# Altium PCB PCB_cut_wire.PcbDoc
Units mil, origin at the board's own origin, x right, y up, seen from the top; angles counter-clockwise.
Board outline 3455 x 3407.12 mil, 2 copper layers (Top Layer, Bottom Layer); 80 components, 77 nets, 344 pads, 517 vias.
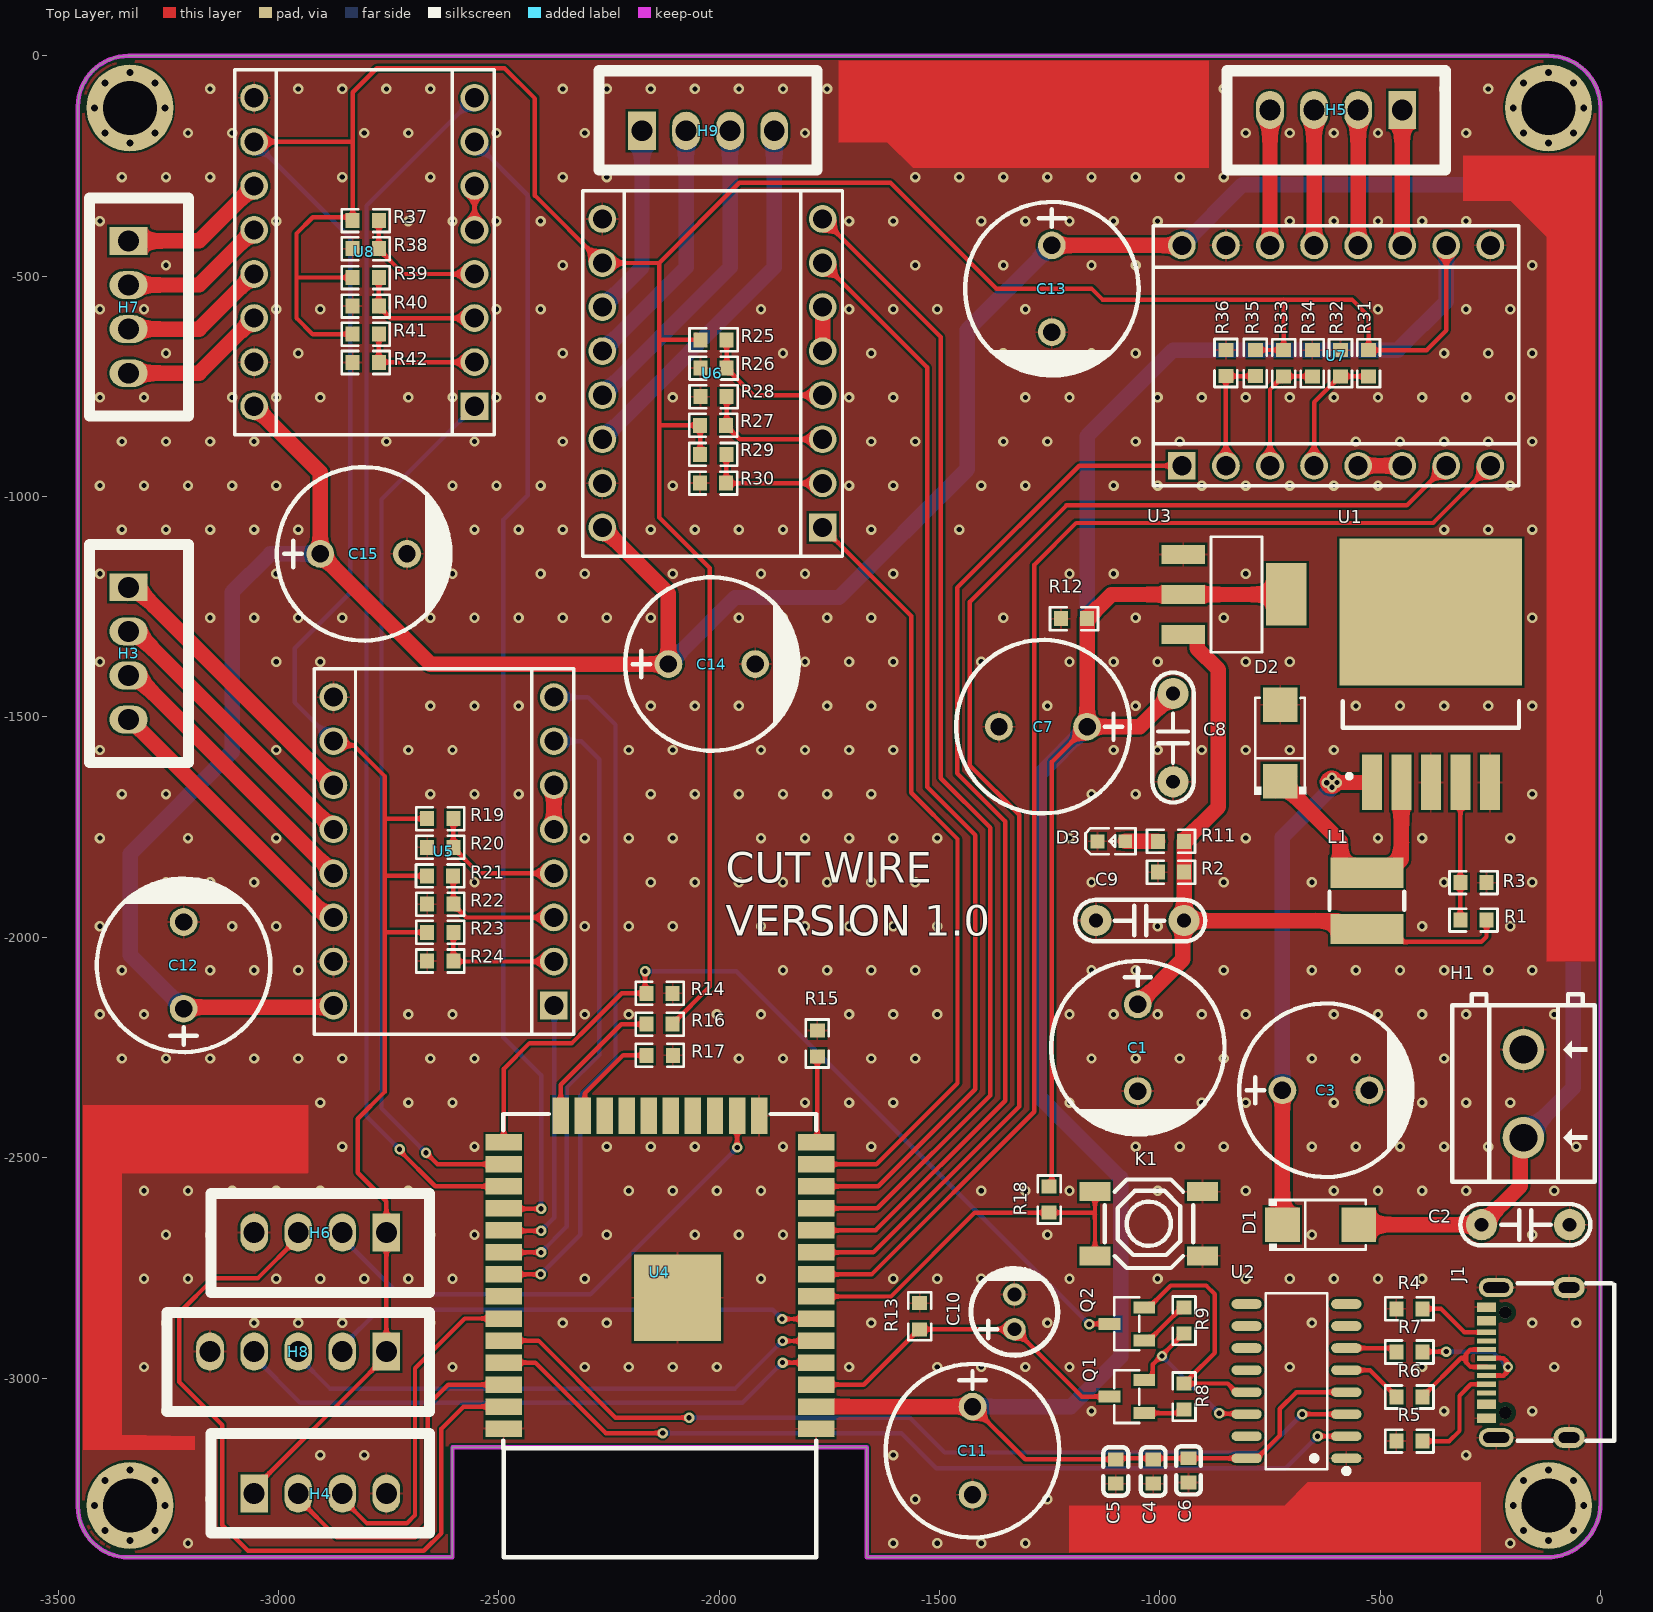
[diagram p0: Top Layer view]
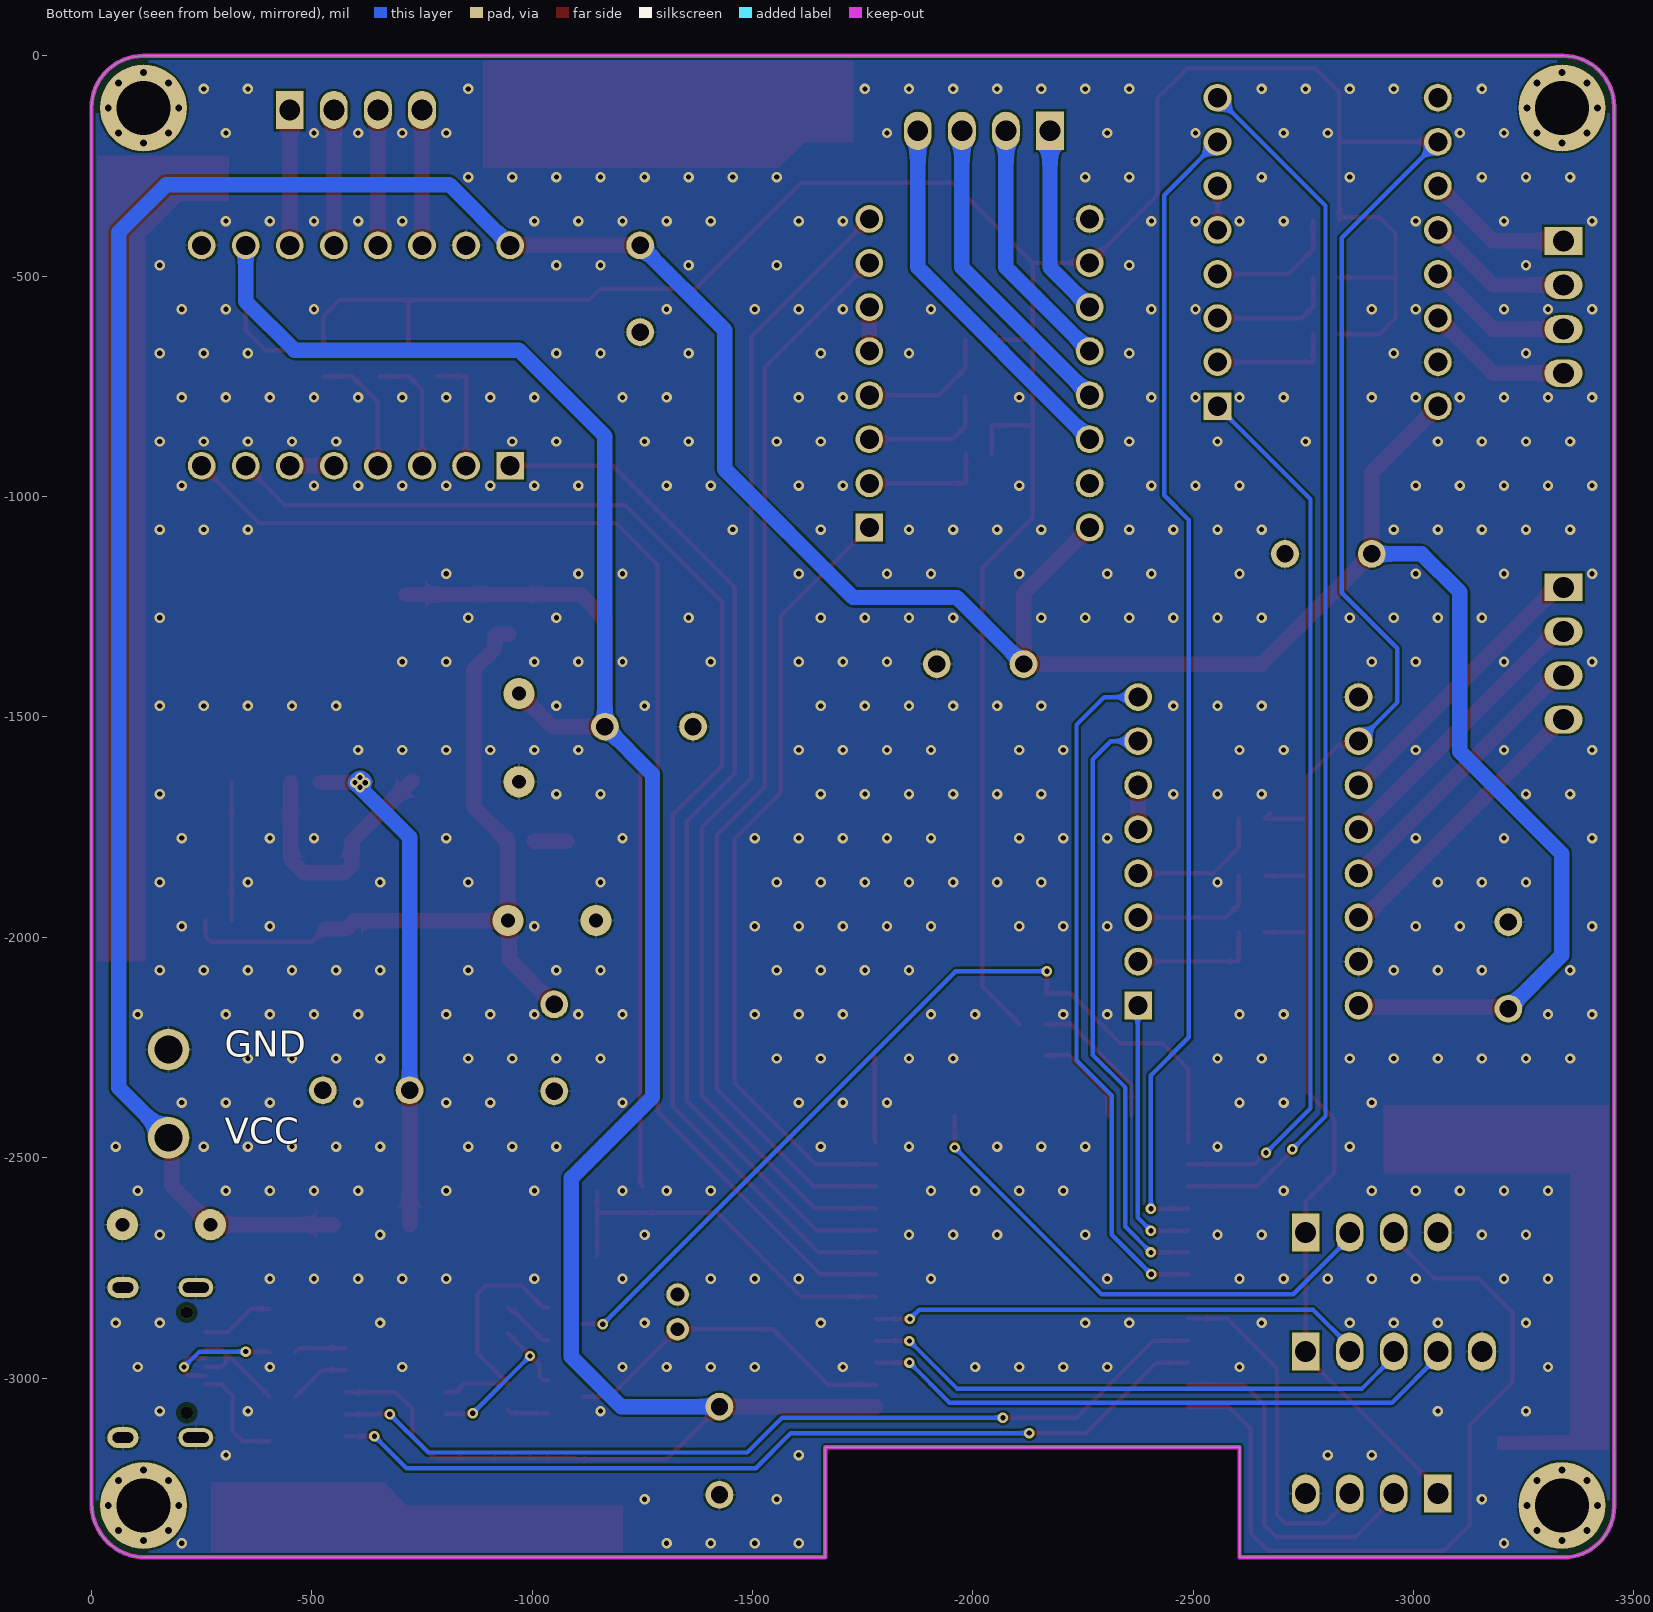
[diagram p1: Bottom Layer view, seen from below]
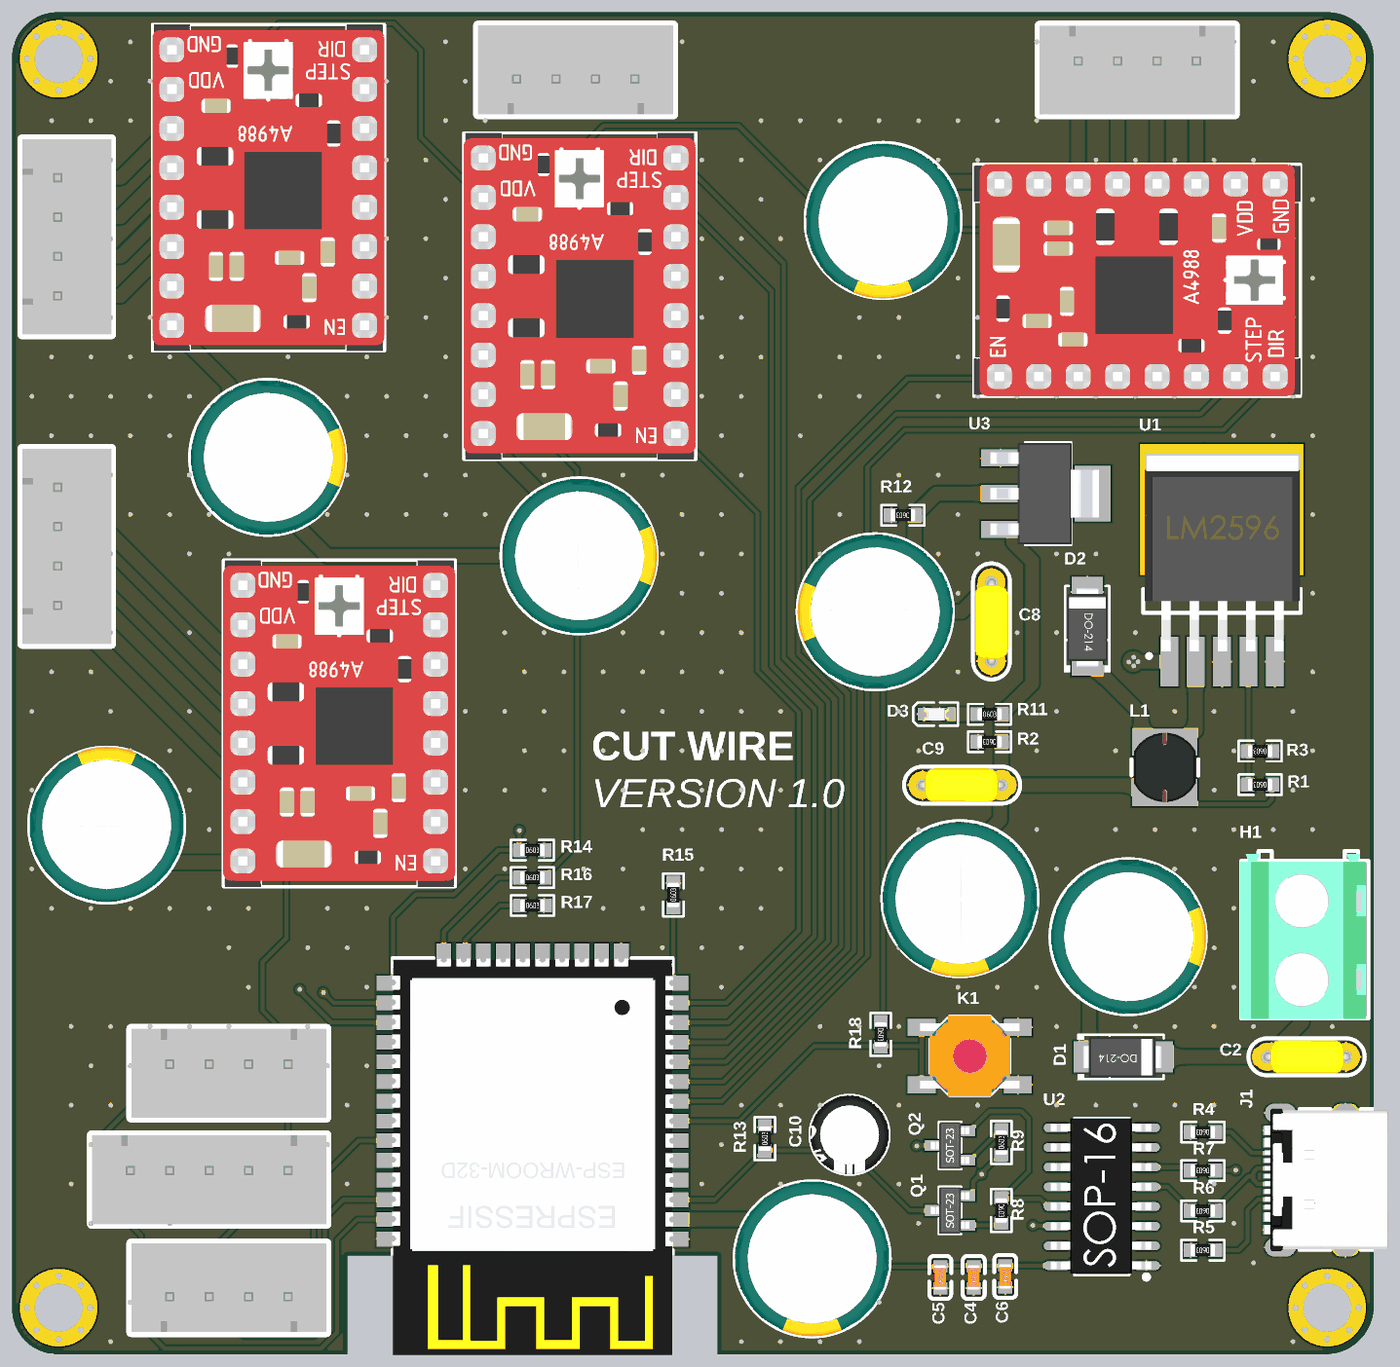
[diagram p2: 3D render of the assembled board from above, using the file's embedded part models]

## Layer stack, top to bottom
Top Solder: solder mask 0.4, Solder Resist, Dk 3.5
Top Layer: signal copper 1.4
Dielectric 1: dielectric 12.6, FR-4, Dk 4.8
Bottom Layer: signal copper 1.4
Bottom Solder: solder mask 0.4, Solder Resist, Dk 3.5

## Board outline
-3455,-3291.6 ccw(c-3339.47,-3291.6) -3339.47,-3407.12 -2605,-3407.12 -2605,-3157.12 -1665,-3157.12 -1665,-3407.12 -122.4,-3407.12 ccw(c-122.4,-3284.73) 0,-3284.73 0,-117.43 ccw(c-117.43,-117.43) -117.43,0 -3340.28,0 ccw(c-3340.28,-114.72) -3455,-114.72

## Design rules (kind name [scope] priority, off if disabled: settings)
BoardOutlineClearance [All] p1: gap=0 ignorepadtopadclearanceinfootprint=FALSE
Clearance [All] p1: gap=5 ignorepadtopadclearanceinfootprint=FALSE except(9.84: Arc-Hole Track-Hole SMDPad-Hole THPad-Hole Via-Hole Fill-Hole Poly-Hole Region-Hole Text-Hole)
ComponentClearance [All] p1: gap=5 collisioncheckmode=3 verticalgap=5 showdistances=TRUE
DiffPairsRouting [All] p1: maxlimit=10 minlimit=5 mostfreqgap=5 toplayer_minwidth=5 toplayer_maxwidth=1000 toplayer_prefwidth=5 bottomlayer_minwidth=5 bottomlayer_maxwidth=1000 bottomlayer_prefwidth=5 maxuncoupledlength=500
Height [All] p1: minheight=0 maxheight=71497.94 prefheight=500
HoleSize [All] p1: absolutevalues=TRUE maxlimit=248.03 minlimit=11.81 maxpercent=80.000 minpercent=20.000
HoleToHoleClearance [All] p1: gap=0 allowstackedmicrovias=FALSE
MinimumAnnularRing [All] p1: minimumring=3
MinimumSolderMaskSliver [All] p1: minsoldermaskwidth=0
PlaneClearance [All] p1: clearance=5
PlaneConnect PlaneConnectPowerPads [InPadClass('PowerPads')] p1: planeconnectstyle=Direct reliefexpansion=20 reliefentries=4 reliefconductorwidth=10 reliefairgap=10
PlaneConnect [All] p2: pad.planeconnectstyle=Relief pad.reliefexpansion=11.81 pad.reliefentries=4 pad.reliefconductorwidth=5 pad.reliefairgap=5 via.planeconnectstyle=Direct via.reliefexpansion=11.81 via.reliefentries=4 via.reliefconductorwidth=5 via.reliefairgap=5
PolygonConnect PolygonConnectPowerPads [All vs (InPadClass('PowerPads'))] p1: connectstyle=Direct reliefconductorwidth=10 reliefentries=4 polygonreliefangle="90 Angle" airgapwidth=10
PolygonConnect [All] p2: thpad.connectstyle=Relief thpad.reliefconductorwidth=5 thpad.reliefentries=4 thpad.polygonreliefangle="90 Angle" thpad.airgapwidth=5 smdpad.connectstyle=Relief smdpad.reliefconductorwidth=5 smdpad.reliefentries=4 smdpad.polygonreliefangle="90 Angle" smdpad.airgapwidth=5 via.connectstyle=Direct via.reliefconductorwidth=5 via.reliefentries=4 via.polygonreliefangle="90 Angle" via.airgapwidth=5
RoutingVias [All] p1: holewidth=11.81 width=23.62 viastyle="Through Hole" minholewidth=11.81 minwidth=23.62 maxholewidth=23.62 maxwidth=259.84
SilkToSilkClearance [All] p1: silktosilkclearance=0
SilkToSolderMaskClearance [IsPad] p1: minsilkscreentomaskgap=0 clearancetoexposedcopper=TRUE
SolderMaskExpansion [All] p1: expansion=2.95 istentingtop=FALSE
Width [All] p1: maxlimit=1000 minlimit=5 preferedwidth=5 minimp=50.000000 maximp=50.000000 favimp=50.000000
20 further rules are at their usual default settings.

## Classes and differential pairs
component class "Voltage Source": C1 C2 C3 C4 C5 C6 C7 C8 C9 D1 D2 D3 J1 L1 Q1 Q2 R1 R2 R3 R4 R5 R6 R7 R8 R9 R11 R12 U1 U2 U3
component class Peripheral: C12 C13 C14 C15 R19 R20 R21 R22 R23 R24 R25 R26 R27 R28 R29 R30 R31 R32 R33 R34 R35 R36 R37 R38 R39 R40 R41 R42 U5 U6 U7 U8
component class "Micro Controller": C10 C11 K1 R13 R14 R15 R16 R17 R18 U4
component class Connector: H1 H3 H4 H5 H6 H7 H8 H9
differential pair D: +D_P -D_N

## Components (designator, comment, footprint, x,y, rotation, side; value= is the part's Value field where it differs from the comment)
C1 "470uF" "470uF 35V, D10xL13mm" -1050,-2252.12 r270 top
C2 "100nF" "tu tantalum dip5.08" -170,-2652.12 r180 top
C3 "470uF" "470uF 35V, D10xL13mm" -621.85,-2347.12 r0 top
C4 "100nF" C0603 -1015,-3212.12 r90 top
C5 "10uF" C0603 -1100,-3212.12 r90 top
C6 "22uF" C0603 -935,-3209.68 r90 top
C7 "3300uF" "Through Hole,D8xL16mm" -1265,-1522.12 r180 top
C8 "100nF" "tu tantalum dip5.08" -970,-1547.12 r90 top
C9 "100nF" "tu tantalum dip5.08" -1045,-1962.12 r0 top
C10 "10uF" C_TH_5x11mm -1330,-2850 r90 top
C11 "3300uF" "Through Hole,D8xL16mm" -1425,-3165 r270 top
C12 "470uF" "470uF 35V, D10xL13mm" -3215,-2062.12 r90 top
C13 "470uF" "470uF 35V, D10xL13mm" -1245,-530 r270 top
C14 "470uF" "470uF 35V, D10xL13mm" -2015,-1380 r0 top
C15 "470uF" "470uF 35V, D10xL13mm" -2805,-1130 r0 top
D1 "SS34" SS34 -635.23,-2652.12 r0 top
D2 "SS34" SS34 -727,-1559 r90 top
D3 "YELLOW" LED0603 -1110,-1782.12 r0 top
H1 "KF127-5.08-2P" KF127-5.08-2P -175,-2342.12 r90 top
H3 "Header 4P 2.54 Duc Thang" XH2.54M-4 -3340,-1206 r270 top
H4 "Header 4P 2.54 Duc Thang" XH2.54M-4 -3055,-3262.12 r0 top
H5 "Header 4P 2.54 Duc Thang" XH2.54M-4 -450,-122.76 r180 top
H6 "Header 4P 2.54 Duc Thang" XH2.54M-4 -2755,-2670 r180 top
H7 "Header 4P 2.54 Duc Thang" XH2.54M-4 -3340,-420 r270 top
H8 "Header 5P 2.54 Duc Thang" XH2.54M-5 -2755,-2940 r180 top
H9 "Header 4P 2.54 Duc Thang" XH2.54M-4 -2175,-170 r0 top
J1 "TYPE-C 16PIN 2MD(073)" TYPE_C_FAMALE -165,-2965 r90 top
K1 "TS-1140SP-4x4x1.5-260" 4x4x1.5 -1025,-2650 r180 top
L1 "47uH" CD43 -530,-1917.12 r0 top
Q1 "S8050" S8050 -1075,-3042.12 r0 top
Q2 "S8050" S8050 -1075,-2877.12 r0 top
R1 "3k8" R0603 -288.34,-1960.9 r180 top
R2 "5k6" R0603 -974.66,-1852.12 r180 top
R3 "1k" R0603 -288.34,-1875.9 r180 top
R4 "5k1Ω" R0603 -433.58,-2843.03 r180 top
R5 "5k1Ω" R0603 -433.58,-3143.03 r180 top
R6 "0Ω" R0603 -433.58,-3043.03 r180 top
R7 "0Ω" R0603 -433.58,-2940.9 r180 top
R8 "10kΩ" R0603 -945,-3042.12 r270 top
R9 "10kΩ" R0603 -945,-2869.66 r90 top
R11 "1kΩ" R0603 -974.66,-1782.12 r0 top
R12 "5k6" R0603 -1194.66,-1277.12 r180 top
R13 "10kΩ" R0603 -1545,-2859.71 r90 top
R14 "10kΩ" R0603 -2135,-2127.12 r0 top
R15 "10kΩ" R0603 -1777,-2241 r90 top
R16 "10kΩ" R0603 -2135,-2197.12 r0 top
R17 "10kΩ" R0603 -2134.66,-2267.8 r0 top
R18 "10kΩ" R0603 -1251,-2595 r270 top
R19 "10kΩ" R0603 -2632.72,-1730.8 r180 top
R20 "10kΩ" R0603 -2632.72,-1795.8 r180 top
R21 "10kΩ" R0603 -2633.06,-1860.8 r180 top
R22 "10kΩ" R0603 -2632.72,-1924.8 r180 top
R23 "10kΩ" R0603 -2632.58,-1988.77 r180 top
R24 "10kΩ" R0603 -2632.72,-2053.8 r180 top
R25 "10kΩ" R0603 -2012.48,-644.39 r180 top
R26 "10kΩ" R0603 -2012.48,-708.39 r180 top
R27 "10kΩ" R0603 -2013.48,-838.39 r180 top
R28 "10kΩ" R0603 -2012.48,-773.39 r180 top
R29 "10kΩ" R0603 -2013.14,-904.36 r180 top
R30 "10kΩ" R0603 -2013.48,-969.39 r180 top
R31 "10kΩ" R0603 -526.26,-697.42 r90 top
R32 "10kΩ" R0603 -589.96,-697.42 r90 top
R33 "10kΩ" R0603 -718.96,-697.42 r90 top
R34 "10kΩ" R0603 -653.96,-697.42 r90 top
R35 "10kΩ" R0603 -783.19,-697 r90 top
R36 "10kΩ" R0603 -849.92,-697 r90 top
R37 "10kΩ" R0603 -2801.87,-373.78 r180 top
R38 "10kΩ" R0603 -2801.87,-437.58 r180 top
R39 "10kΩ" R0603 -2801.87,-503.01 r180 top
R40 "10kΩ" R0603 -2801.87,-567.78 r180 top
R41 "10kΩ" R0603 -2801.87,-631.54 r180 top
R42 "10kΩ" R0603 -2801.87,-695.78 r180 top
U1 "LM2596SX/NOPB" LM2596SX-5.0/NOPB -385,-1648.69 r90 top
U2 "CH340C" CH340C -690,-3007.12 r90 top
U3 "AMS1117-3.3" AMS1117-3.3 -830,-1222.12 r180 top
U4 "ESP32-WROOM-32D-N4" ESP32-WROOM-32D-N4 -2134.32,-2760.08 r90 top
U5 "A4988" A4988-driver_step -2375,-2155 r90 top
U6 "A4988" A4988-driver_step -1765,-1070 r90 top
U7 "A4988" A4988-driver_step -950,-930 r0 top
U8 "A4988" A4988-driver_step -2555,-795 r90 top

## Footprints (in the part's own frame and the unit in brackets; to place one, negate y for a bottom-side part, rotate by r counter-clockwise, add the part's x,y. Pads: shape width x height; smd on the part's side, far side on the other; paste and mask are expansions set on the pad)
4x4x1.5 [mm]
  rect 1.8x1.1 smd paste+0 mask+0.051: 1(-3.1,1.85) 2(3.1,1.85) 3(-3.1,-1.85) 4(3.1,-1.85)
  silkscreen extent -2.55,-2.55 2.55,2.55, body extent -3.2,-2.6 3.2,2.6, height 1.5
"470uF 35V, D10xL13mm" [mm] "470uF ±20% 35V Through Hole,D10xL13mm"
  round 1.6 hole 1 paste-2539.97 mask+0.051: 1(-2.54,0) 2(2.46,0)
  silkscreen extent -5.04,-5 5.04,5, body extent -5,-4.99 5,4.99, height 20.13
A4988-driver_step [mm]
  rect 1.6x1.6 hole 1.1: 1(0,0)
  round 1.6 hole 1.1: 2(2.54,0) 3(5.08,0) 4(7.62,0) 5(10.16,0) 6(12.7,0) 7(15.24,0) 8(17.78,0) 9(17.78,12.7) 10(15.24,12.7) 11(12.7,12.7) 12(10.16,12.7) 13(7.62,12.7) 14(5.08,12.7) 15(2.54,12.7) 16(0,12.7)
  silkscreen extent -1.65,-1.14 19.41,13.82, body extent -1.66,-1.13 19.4,13.83, height 14.05
AMS1117-3.3 [mm]
  rect 2.5x1.1 smd paste+0 mask+0.051: 1(2.97,-2.3) 2(2.97,0) 3(2.97,2.3)
  rect 2.34x3.6 smd paste+0 mask+0.051: 4(-2.97,0)
  silkscreen extent -1.57,-3.33 1.37,3.33, body extent -3.37,-3.25 3.63,3.25, height 1.8
C0603 [mm]
  rect 0.8x0.9 smd: 1(-0.7,0) 2(0.7,0)
  silkscreen extent -1.39,-0.71 1.39,0.71, body extent -0.8,-0.4 0.8,0.4, height 0.4
C_TH_5x11mm [mm]
  round 1.3 hole 0.8 paste-2539.97 mask+0.051: 1(-1,0) 2(1,0)
  silkscreen extent -2.5,-2.5 2.5,2.5, body extent -2.55,-2.55 2.55,2.55, height 1.69
CD43 [mm]
  rect 4.2x1.75 smd paste+0 mask+0.051: 1(0,1.625) 2(0,-1.625)
  silkscreen extent -2.16,-0.52 2.16,0.52, body extent -2,-2.25 2,2.25, height 3.22
CH340C [mm]
  oval 0.56x1.745 smd paste+0 mask+0.051: 1(-4.445,-2.873) 2(-3.175,-2.873) 3(-1.905,-2.873) 4(-0.635,-2.873) 5(0.635,-2.873) 6(1.905,-2.873) 7(3.175,-2.873) 8(4.445,-2.873) 9(4.445,2.873) 10(3.175,2.873) 11(1.905,2.873) 12(0.635,2.873) 13(-0.635,2.873) 14(-1.905,2.873) 15(-3.175,2.873) 16(-4.445,2.873)
  silkscreen extent -5.33,-3.02 5.08,1.77, body extent -4.95,-3.18 5.05,3.28, height 1.92
ESP32-WROOM-32D-N4 [mm]
  rect 0.95x2.1 smd paste+0 mask+0.051: 1(-9.015,-9) 2(-7.745,-9) 3(-6.475,-9) 4(-5.205,-9) 5(-3.935,-9) 6(-2.665,-9) 7(-1.395,-9) 8(-0.125,-9) 9(1.145,-9) 10(2.415,-9) 11(3.685,-9) 12(4.955,-9) 13(6.225,-9) 14(7.495,-9) 25(7.495,9) 26(6.225,9) 27(4.955,9) 28(3.685,9) 29(2.415,9) 30(1.145,9) 31(-0.125,9) 32(-1.395,9) 33(-2.665,9) 34(-3.935,9) 35(-5.205,9) 36(-6.475,9) 37(-7.745,9) 38(-9.015,9)
  rect 2.1x0.95 smd paste+0 mask+0.051: 15(9.015,-5.715) 16(9.015,-4.445) 17(9.015,-3.175) 18(9.015,-1.905) 19(9.015,-0.635) 20(9.015,0.635) 21(9.015,1.905) 22(9.015,3.175) 23(9.015,4.445) 24(9.015,5.715)
  rect 5x5 smd paste+0 mask+0.051: 39(-1.472,-1.017)
  silkscreen extent -16.44,-9.02 9.12,9.02, body extent -16.48,-9.05 9.07,9.05, height 3.9
KF127-5.08-2P [mm] "1.5 1x2P 14~26 Green -40?~+105? 15A 250V Through Hole 5.08mm 1 2 Through Hole,P=5.08mm Wire to Board RoHS"
  round 2.4 hole 1.6 paste-2539.97 mask+0.051: 1(-2.857,0) 2(2.222,0)
  silkscreen extent -5.4,-4.1 5.4,4.1, body extent -5.43,-3.94 5.23,4.16, height 10.1
LED0603 [mm]
  rect 0.8x0.8 smd paste+0 mask+0.051: 1(-0.799,-0.004) 2(0.799,0.004)
  silkscreen extent -1.49,-0.75 1.39,0.76, body extent -0.8,-0.42 0.8,0.38, height 0.7
LM2596SX-5.0/NOPB [mm] "150kHz Buck Fixed 1 TO-263-5 Voltage Regulators - DC DC Switching Regulators RoHS"
  rect 3.2x1.15 smd paste+0 mask+0.051: 1(0,3.404) 2(0,1.702) 3(0,0) 4(0,-1.702) 5(0,-3.404)
  rect 8.46x10.53 smd paste-6: 6(9.819,0)
  silkscreen extent 0.24,-5.08 4.68,5.08, body extent 0.66,-5.03 13.4,4.97, height 4.5
R0603 [mil]
  rect 31.75x34.02 smd paste-3937.01 mask+2: 1(-29.66,0) 2(29.66,0)
  silkscreen extent -55,-26 55,26, body extent -31,-16 31,16, height 18
S8050 [mm]
  rect 1.25x0.7 smd paste+0 mask+0.051: 1(1,-0.95) 2(1,0.95) 3(-1,0)
  silkscreen extent -0.73,-1.53 0.73,1.53, body extent -1.25,-1.5 1.25,1.5, height 1.1
SS34 [mm]
  rect 2x2 smd paste+0 mask+0.051: 1(-2.2,0) 2(2.2,0)
  silkscreen extent -2.98,-1.5 2.6,1.5, body extent -2.65,-1.29 2.49,1.27, height 2.63
"Through Hole,D8xL16mm" [mm] "3300uF ±20% 6.3V Through Hole,D8xL16mm 2000hrs"
  round 1.6 hole 1 paste-2539.97 mask+0.051: 1(-2.54,0) 2(2.54,0)
  silkscreen extent -5,-5 5,5, body extent -5,-4.99 5,4.99, height 20.13
"tu tantalum dip5.08" [mm]
  round 1.8 hole 0.8: 1(-2.54,0) 2(2.54,0)
  silkscreen extent -3.74,-1.2 3.76,1.2, body extent -2.82,-1.08 2.77,1.08, height 6.27
TYPE_C_FAMALE [mm]
  rect 0.55x1.1 smd paste-100 mask+0.05: 1(-3.2,2.375) 2(-2.4,2.375) 11(2.4,2.375) 12(3.2,2.375)
  rect 0.3x1.1 smd paste-100 mask+0.05: 3(-1.75,2.375) 4(-1.25,2.375) 5(-0.75,2.375) 6(-0.25,2.375) 7(0.25,2.375) 8(0.75,2.375) 9(1.25,2.375) 10(1.75,2.375)
  oval 1.2x1.8 hole 0.6 slot 1.2 at 90 deg paste-2539.97 mask+0.05: 13(-4.325,-2.375) 14(4.325,-2.375)
  oval 1.1x2 hole 0.6 slot 1.5 at 90 deg paste-2539.97 mask+0.05: 13(-4.325,1.825) 14(4.325,1.825)
  round 0.7 hole 0.7 unplated paste-2539.97: ""(-2.89,1.305) ""(2.89,1.305)
  silkscreen extent -4.5,-4.97 4.57,0.6, body extent -4.57,-5.09 4.63,2.86, height 3.21
XH2.54M-4 [mm]
  rect 1.6x2.2 hole 1.2: 1(0,0)
  oval 1.6x2.2 hole 1.2: 2(2.54,0) 3(5.08,0) 4(7.62,0)
  silkscreen extent -2.48,-2.26 10.1,3.46, body extent -2.48,-2.26 10.1,3.48, height 6.91
XH2.54M-5 [mm]
  rect 1.6x2.2 hole 1.2: 1(0,0)
  oval 1.6x2.2 hole 1.2: 2(2.54,0) 3(5.08,0) 4(7.62,0) 5(10.16,0)
  silkscreen extent -2.48,-2.26 12.64,3.46, body extent -2.48,-2.26 12.64,3.48, height 6.91

## Part data
C1 C3 C12 C13 C14 C15: library part "470uF  35V, D10xL13mm", "470uF ±20% 35V Through Hole,D10xL13mm", LCSC Part #=C2691847, Manufacturer=AISHI, Mfr. Part #=SPZ1VM471G13O00RAXXX, Package="Through Hole,D10xL13mm", Key Attributes="CAP ALUM POLY 470uF ±20% 35V TH", Link=https://www.lcsc.com/product-detail/C2691847.html
C2 C8 C9: library part "Tu tantalum 100nF 50V 20% DIP5.08", "Cắm", Chung_Loai=Cắm, Don_Vi=Con, Ma_Hang=MH003955, So_Chan=2, Ten_Linh_Kien="Tụ tantalum 104-100nF 50V 20% DIP5.08 (sứ vàng)(10PCS)"
C4: library part C0603_100nF_±10%_X7R, "50V 100nF X7R ±10% 0603 Multilayer Ceramic Capacitors MLCC - SMD/SMT ROHS", LCSC Part #=C14663, Manufacturer=YAGEO, Mfr. Part #=CC0603KRX7R9BB104, Package=0603, Temperature Coefficient=X7R, Tolerance=±10%, Capacitance=100nF, Link=https://www.lcsc.com/product-detail/C14663.html?s_z=n_capital%25200603%2520100nf
C5: library part C0603_10uF_±10%_X7R, "25V 10uF X5R ±20% 0603 Multilayer Ceramic Capacitors MLCC - SMD/SMT ROHS", LCSC Part #=C596327, Manufacturer=YAGEO, Mfr. Part #=CC0603MRX5R8BB106, Package=0603, Temperature Coefficient=X5R, Tolerance=±20%, Capacitance=10uF, Link=https://www.lcsc.com/product-detail/C596327.html?s_z=n_capital%25200603%252010uF%2520yageo
C6: library part C0603_22uF_±20%_X5R, "6.3V 22uF X5R ±20% 0603 Multilayer Ceramic Capacitors MLCC - SMD/SMT ROHS", LCSC Part #=C109448, Manufacturer=YAGEO, Mfr. Part #=CC0603MRX5R5BB226, Package=0603, Temperature Coefficient=X5R, Tolerance=±20%, Capacitance=22uF, ComponentLink1Description="New link", Link=https://www.lcsc.com/product-detail/C109448.html?s_z=n_capital%25200603%252022uf%2520yageo
C7 C11: library part "Through Hole,D8xL16mm", "3300uF ±20% 6.3V Through Hole,D8xL16mm 2000hrs", LCSC Part #=C5438512, Manufacturer="Honor Elec", Mfr. Part #=HS0J338M0816PC, Key Attributes="CAP ALUM POLY 3300uF ±20% 6.3V TH", Link=https://www.lcsc.com/product-detail/C5438512.html, Package="Through Hole,D8xL16mm"
C10: library part C_10uF_5x11TH, "10uF 50V ±20% Through Hole,D5xL11mm Aluminum Electrolytic Capacitors - Leaded ROHS", LCSC Part #=C88726, Manufacturer=Rubycon, Mfr. Part #=50YXF10MEFC5X11, Package="Through Hole,D5xL11mm", Tolerance=±20%, Voltage Rating=50V, Capacitance=10uF, Key Attributes="CAP ALUM 10uF ±20% 50V TH", Link=https://www.lcsc.com/product-detail/C88726.html?s_z=n_electrolytic%252010uF, Pin Spacing=2mm
D1 D2: "40V Independent 3A 550mV@3A SMA(DO-214AC) Schottky Diodes ROHS", Current - Rectified=3A, LCSC Part #=C8678, Manufacturer="MDD(Microdiode Semiconductor)", Package=SMA(DO-214AC), Voltage - DC Reverse(Vr)=40V, Link=https://www.lcsc.com/product-detail/C8678.html?s_z=n_SS34, Mfr. Part #=SS34
D3: library part D0603_YELLOW, "25mcd~40mcd Water Clear -40℃~+85℃ 624nm Red 120° 60mW 0402 LED Indication - Discrete ROHS", LCSC Part #=C965793, Manufacturer=XINGLIGHT, Mfr. Part #=XL-1005UGC, Package=0603, Power(Watts)=60mW, Voltage - Forward(Vf)=3V, Illumination Color=YELLOW, Link=https://www.lcsc.com/product-detail/C136765.html?s_z=n_LED%25200402%2520RED
H1: "1.5 1x2P 14~26 Green -40℃~+105℃ 15A 250V Through Hole 5.08mm 1 2 Through Hole,P=5.08mm Wire to Board RoHS", LCSC Part #=C474906, Manufacturer="Cixi Kefa Elec", Package="Through Hole,P=5.08mm", Key Attributes="TERM BLK 2POS 5.08mm TH", Link=https://www.lcsc.com/product-detail/C474906.html?s_z=n_kf127, Mfr. Part #=KF127-5.08-2P
H3 H4 H5 H6 H7 H8 H9: "Cắm", Chung_Loai=Cắm, Don_Vi=Con
  H3 H4 H5 H6 H7 H9: Ma_Hang=MH001285, Ten_Linh_Kien="Header 4P XH2.54-4P Đực Thẳng"
  H8: Ma_Hang=MH001298, Ten_Linh_Kien="Header 5P XH2.54-5P Đực Thẳng"
J1: library part TYPE_C_FAMALE_16PIN, "3A 1 Surface Mount, Right Angle 16P Female -25℃~+85℃ Type-C SMD USB Connectors ROHS", LCSC Part #=C2765186, Manufacturer="SHOU HAN", Package=SMD, Link=https://www.lcsc.com/product-detail/C2765186.html?s_z=n_type%2520c, Mfr. Part #="TYPE-C 16PIN 2MD(073)", Number of Contacts=16P
K1: "SMD Tactile Switches ROHS", LCSC Part #=C49023394, Manufacturer=CAX, Package=SMD, Link=https://www.lcsc.com/product-detail/C49023394.html?s_z=n_button%25204x4, Mfr. Part #=TS-1140SP-4x4x1.5-260
L1: library part CD4-10UH, "1.15A 10uH Unshielded Inductor ±20% SMD,4x4.5mm Power Inductors ROHS", Current Rating=1.15A, DC Resistance(DCR)=182mΩ, Inductance=10uH, LCSC Part #=C18734467, Manufacturer=ZE, Mfr. Part #=CD43-100M, Package=SMD,4x4.5mm, Tolerance=±20%, Key Attributes="FIXED IND 10uH 1.15A 182mΩ SMD,4x4.5mm", Link=https://www.lcsc.com/product-detail/C18734467.html?s_z=n_CD43%252010uH
Q1 Q2: "25V 300mW 500mA SOT-23 Bipolar (BJT) ROHS", Current - Collector(Ic)=500mA, LCSC Part #=C916390, Manufacturer=JSMSEMI, Package=SOT-23, Transition frequency(fT)=150MHz, Key Attributes="TRANS 25V 500mA SOT-23", Link=https://www.lcsc.com/product-detail/C916390.html?s_z=n_s8050, Mfr. Part #=S8050, Vce Saturation(VCE(sat))=600mV
R1 R2 R3 R12: library part R0603_4k7Ω_±1%, "62.5mW Thick Film Resistor 50V ±1% ±200ppm/℃ 10Ω 0402 Chip Resistor - Surface Mount ROHS", LCSC Part #=C138066, Manufacturer=YAGEO, Mfr. Part #=RC0402FR-0710RL, Package=0603, Resistance=4k7Ω, Tolerance=±1%, Link=https://www.lcsc.com/product-detail/C138066.html?s_z=n_resistor%25200402%252010R
R4 R5: library part R0603_5k1Ω_±1%, "100mW Thick Film Resistor 75V ±100ppm/℃ ±1% 5.1kΩ 0603 Chip Resistor - Surface Mount ROHS", LCSC Part #=C2907044, Manufacturer=FOJAN, Mfr. Part #=FRC0603F5101TS, Package=0603, Tolerance=±1%, Key Attributes="RES 5.1kΩ ±1% 100mW 0603", Link=https://www.lcsc.com/product-detail/C2907044.html?s_z=n_5k1%25200603, Resistance=5k1Ω
R6 R7: library part R0603_0Ω_±5%, "100mW Thick Film Resistor 75V ±5% 0Ω 0603 Chip Resistor - Surface Mount ROHS", LCSC Part #=C95177, Manufacturer=YAGEO, Mfr. Part #=RC0603JR-070RL, Package=0603, Tolerance=±5%, Key Attributes="RES 0Ω ±5% 100mW 0603", Link=https://www.lcsc.com/product-detail/C138066.html?s_z=n_resistor%25200402%252010R, Resistance=0Ω
R8 R9 R13 R14 R15 R16 R17 R18 R19 R20 R21 R22 R23 R24 R25 R26 R27 R28 R29 R30 R31 R32 R33 R34 R35 R36 R37 R38 R39 R40 R41 R42: library part R0603_10kΩ_±1%, "62.5mW Thick Film Resistor 50V ±1% ±200ppm/℃ 10Ω 0402 Chip Resistor - Surface Mount ROHS", LCSC Part #=C138066, Manufacturer=YAGEO, Mfr. Part #=RC0402FR-0710RL, Package=0603, Tolerance=±1%, Link=https://www.lcsc.com/product-detail/C138066.html?s_z=n_resistor%25200402%252010R, Resistance=10kΩ
R11: library part R0603_1kΩ_±1%, "62.5mW Thick Film Resistor 50V ±1% ±200ppm/℃ 10Ω 0402 Chip Resistor - Surface Mount ROHS", LCSC Part #=C138066, Manufacturer=YAGEO, Mfr. Part #=RC0402FR-0710RL, Package=0603, Tolerance=±1%, Link=https://www.lcsc.com/product-detail/C138066.html?s_z=n_resistor%25200402%252010R, Resistance=1kΩ
U1: "150kHz Buck Fixed 1 TO-263-5 Voltage Regulators - DC DC Switching Regulators RoHS", LCSC Part #=C10002, Manufacturer=TI, Package=TO-263-5, Key Attributes="LM2596 SIMPLE SWITCHER 3A Step-Down Voltage Regulator", Link=https://www.lcsc.com/product-detail/C10002.html?s_z=n_lm2596, Mfr. Part #=LM2596SX/NOPB
U2: "2Mbps Transceiver USB 2.0 SOP-16 USB Converters ROHS", LCSC Part #=C84681, Manufacturer=WCH, Package=SOP-16, Voltage - Supply=3.3V;5V, Link=https://www.lcsc.com/product-detail/C84681.html?s_z=n_CH340C, Mfr. Part #=CH340C
U3: "72dB@(120Hz) 1A Fixed 3.3V Positive 16V SOT-223 Voltage Regulators - Linear, Low Drop Out (LDO) Regulators ROHS", LCSC Part #=C6186, Manufacturer="Advanced Monolithic Systems", Output Current=1A, Package=SOT-223, Link=https://www.lcsc.com/product-detail/C6186.html?s_z=n_ams1117-3.3, Mfr. Part #=AMS1117-3.3
U4: library part "ESPRESSIF ESP32-WROOM-32D-N4", "SMD,18x25.5mm WiFi Modules ROHS", LCSC Part #=C473012, Manufacturer=ESPRESSIF, Package=SMD,18x25.5mm, Link=https://www.lcsc.com/product-detail/C473012.html?s_z=n_esp32-wroom-32d, Mfr. Part #=ESP32-WROOM-32D-N4
U5 U6 U7 U8: library part Module_A4988

## Free pads (board coordinates)
  round 15.75 hole 15.75: ""(-3416.89,-118.11) ""(-3416.89,-3289.01) ""(-3393.46,-174.68) ""(-3393.46,-61.54) ""(-3393.46,-3345.58) ""(-3393.46,-3232.45) ""(-3336.89,-198.11) ""(-3336.89,-38.11) ""(-3336.89,-3369.01) ""(-3336.89,-3209.01) ""(-3280.32,-174.68) ""(-3280.32,-61.54) ""(-3280.32,-3345.58) ""(-3280.32,-3232.45) ""(-3256.89,-118.11) ""(-3256.89,-3289.01) ""(-198.11,-3289.01) ""(-198.11,-118.11) ""(-174.68,-3345.58) ""(-174.68,-3232.45) ""(-174.68,-174.68) ""(-174.68,-61.54) ""(-118.11,-3369.01) ""(-118.11,-3209.01) ""(-118.11,-198.11) ""(-118.11,-38.11) ""(-61.54,-3345.58) ""(-61.54,-3232.45) ""(-61.54,-174.68) ""(-61.54,-61.54) ""(-38.11,-3289.01) ""(-38.11,-118.11)
  round 196.85 hole 122.05: ""(-3336.89,-118.11) ""(-3336.89,-3289.01) ""(-118.11,-3289.01) ""(-118.11,-118.11)

## Via types
v1: diameter 23.62, hole 11.81, Top Layer to Bottom Layer, tented both sides, 517 vias

## Nets (pads, with @x,y where several pads share a name; then routed paths per layer and width w, separated by ;. In a path a pad name is that pad's centre, name@x,y a point inside that pad or via, vN(x,y) a via of type N, cw(c..) or ccw(c..) an arc to the next point about the centre after c; other vN are vias at no path point)
1A-1: H3.2 U5.12 | length 650.5
  Top Layer w35: H3.2@-3340,-1318.93 -3334.12,-1313.05 -3316.95,-1313.05 U5.12
1A-2: H5.2 U7.12 | length 307.2
  Top Layer w35: U7.12 H5.2
1A-3: H7.2 U8.12 | length 336.8
  Top Layer w35: H7.2 -3180,-520 U8.12
1A-4: H9.2 U6.12 | length 578.7
  Bottom Layer w35: U6.12 -2075,-480 H9.2
1B-1: H3.1 U5.11 | length 645.2
  Top Layer w35: H3.1@-3340,-1220 -3310,-1220 U5.11
1B-2: H5.1 U7.11 | length 307.2
  Top Layer w35: U7.11 H5.1
1B-3: H7.1 U8.11 | length 336.8
  Top Layer w35: H7.1 -3180,-420 U8.11
1B-4: H9.1 U6.11 | length 437.3
  Bottom Layer w35: U6.11 -2175,-480 H9.1
2A-1: H3.3 U5.13 | length 650.5
  Top Layer w35: H3.3@-3340,-1418.93 -3334.12,-1413.05 -3316.95,-1413.05 U5.13
2A-2: H5.3 U7.13 | length 307.2
  Top Layer w35: U7.13 H5.3
2A-3: H7.3 U8.13 | length 336.8
  Top Layer w35: H7.3 -3180,-620 U8.13
2A-4: H9.3 U6.13 | length 720.1
  Bottom Layer w35: U6.13 -1975,-480 H9.3
2B-1: H3.4 U5.14 | length 646.3
  Top Layer w35: H3.4@-3340,-1518.93 -3322.83,-1518.93 -3314.19,-1527.57 -3314.19,-1528.81 -2893.36,-1949.64 -2880.36,-1949.64 U5.14
2B-2: H5.4 U7.14 | length 307.2
  Top Layer w35: U7.14 H5.4
2B-3: H7.4 U8.14 | length 336.8
  Top Layer w35: H7.4 -3180,-720 U8.14
2B-4: H9.4 U6.14 | length 861.5
  Bottom Layer w35: U6.14 -1875,-480 H9.4
+3.3V: C4.2 C5.2 C6.2 C7.1 C8.2 C11.1 H4.1 H6.1 H8.1 R12.1 R16.2 R18.1 R19.2 R21.2 R23.2 R25.2 R27.2 R29.2 R31.2 R33.2 R35.2 R37.2 R39.2 R41.2 U2.4 U2.16 U3.2 U3.4 U4.2 U5.10 U6.10 U7.10 U8.10 | length 17524
  Top Layer w10: H4.1 -3055,-3250.31 -2782.99,-2978.31 -2781.5,-2978.31 -2755,-2951.81 H8.1 H6.1 -2755,-2599 -2820,-2534 -2820,-2412 -2759,-2351 -2759,-1989 ; U8.10 -2831.72,-195 -2831.53,-195.2 ; U5.10 -2865.33,-1564.67 -2828.5,-1564.67 -2759,-1634.17 -2759,-1731 ; R41.2 -2922.46,-631.54 -2959,-595 -2959,-503 ; R39.2 -2958.99,-503.01 ; R19.2@-2674.38,-1718.79 -2673.25,-1718.79 -2662.38,-1729.67 R19.2 -2758.8,-1730.8 -2759,-1731 ; R21.2 -2758.8,-1860.8 -2759,-1861 ; R23.2 -2758.77,-1988.77 -2759,-1989 ; R16.2 -2105.34,-2195.99 -2021,-2111.65 -2021,-1162 -2135.61,-1047.39 -2135.61,-838.39 ; R25.2@-2053.01,-632.38 -2042.14,-643.26 R25.2 -2135,-644.39 -2135.61,-645 ; R29.2 -2042.8,-838.73 R27.2 -2135.61,-838.39 ; C11.1 -1305.44,-3184.56 C5.2 -1097.56,-3182.12 C6.2 U2.16 -779.76,-3182.12 -728,-3130.36 -728,-3070 -690.12,-3032.12 U2.4 ; R18.1 -1245,-2559.34 -1245,-1602.12 C7.1 ; R35.2 -719.38,-667.34 R33.2 -718.96,-553 ; U7.10 -350,-623 -394.76,-667.76 R31.2 -526.26,-590.74 -564,-553 -718.96,-553 ; -2959,-503 -2959,-403 -2922,-366 -2839.31,-366 R37.2 -2831.53,-195.2 ; -2831.53,-195.2 -2831.53,-82.53 -2777,-28 -2487,-28 -2418,-97 -2418,-317 U6.10 -2136,-470 ; -2759,-1989 -2759,-1861 ; -2759,-1861 -2759,-1731 ; -2136,-470 -1954,-288 -1611,-288 -1371,-528 -1155,-528 -1130,-553 -718.96,-553 ; -2136,-470 -2135.61,-470.39 -2135.61,-645 ; -2135.61,-838.39 -2135.61,-645
  Top Layer w35: U4.2 C11.1 ; C8.2 -1045,-1522.12 C7.1 R12.1 -1110,-1222.12 U3.2 U3.4
  Bottom Layer w10: U8.10 -2837,-413 -2837,-1218 -2963,-1344 -2963,-1467 U5.10
  Bottom Layer w35: C11.1 -1202,-3065 -1089,-2952 -1089,-2546 -1273,-2362 -1273,-1630.12 C7.1 -1165,-863 -969.76,-667.76 -460.51,-667.76 -350,-557.25 U7.10
+5V: C1.1 C9.2 L1.2 R1.1 R2.1 R11.2 U3.3 | length 1713.6
  Top Layer w10: L1.2 -500.55,-2010.55 -270.55,-2010.55 -258.68,-1998.68 R1.1
  Top Layer w35: C1.1 -947.93,-2050.06 -947.93,-1965.06 C9.2 ; U3.3 -919.37,-1312.68 -915.22,-1316.83 -915.22,-1344.39 -867,-1392.6 -867,-1704.12 R11.2 R2.1 C9.2 ; L1.2 -578.23,-1981.1 -597.21,-1962.12 C9.2
D_N: R7.2 U2.6 | length 117.3
  Top Layer w10: U2.6 -472.02,-2932.12 R7.2
D_P: R6.2 U2.5 | length 139.6
  Top Layer w10: U2.5 -523.01,-2982.12 -463.24,-3041.9 R6.2
DIR-1: U4.31 U5.8 | length 1567.2
  Top Layer w10: U4.31 -2405,-2765 v1(-2404.79,-2764.79)
  Bottom Layer w10: v1(-2404.79,-2764.79) -2315,-2675 -2315,-2359 -2235,-2279 -2235,-1518 -2298,-1455 U5.8
DIR-2: U4.8 U7.8 | length 3017
  Top Layer w10: U4.8 -1654,-2765 -1285,-2396 -1285,-1155 -1190,-1060 -380,-1060 U7.8
DIR-3: U4.27 U8.8 | length 2791.4
  Top Layer w10: v1(-2725,-2481) -2725,-2484 -2644,-2565 U4.27
  Bottom Layer w10: v1(-2725,-2481) -2800,-2406 -2800,-340 U8.8
DIR-4: U4.11 U6.8 | length 2647.4
  Top Layer w10: U4.11 -1641,-2615 -1385,-2359 -1385,-1751 -1497,-1639 -1497,-638 U6.8
DTR_CH340: Q2.2 R8.1 U2.13 | length 570.6
  Top Layer w10: Q2.2 -1024.8,-2839.72 -975.08,-2790 -895,-2790 -875,-2810 -875,-2942.46 -932.99,-3000.46 -932.99,-3001.59 R8.1@-943.87,-3012.46 ; R8.1 R8.1@-943.87,-3012.46 ; U2.13 -826.42,-3032.12 -846.08,-3012.46 R8.1@-943.87,-3012.46
EN: C10.1 Q1.3 R13.1 U4.3 | length 780.9
  Top Layer w10: U4.3 -1671.76,-3015 -1546.13,-2889.37 R13.1 C10.1 -1177.25,-3042.12 Q1.3
EN-1: U4.29 U5.1 | length 608.9
  Top Layer w10: U4.29 -2487.65,-2666 v1(-2404,-2666)
  Bottom Layer w10: v1(-2404,-2666) -2374,-2636 -2374,-2156 U5.1
EN-2: U4.10 U7.1 | length 2384.7
  Top Layer w10: U4.10 -1645,-2665 -1351,-2371 -1351,-1737 -1460,-1628 -1460,-1207 -1183,-930 U7.1
EN-3: U4.26 U8.1 | length 2010.4
  Top Layer w10: v1(-2665,-2489) -2639,-2515 U4.26
  Bottom Layer w10: v1(-2665,-2489) -2766,-2388 -2766,-1006 U8.1
EN-4: U4.13 U6.1 | length 1785
  Top Layer w10: U4.13 -1643,-2515 -1459,-2331 -1459,-1777 -1564,-1672 -1564,-1271 U6.1
GND: C1.2 C2.1 C3.2 C4.1 C5.1 C6.1 C7.2 C8.1 C9.1 C10.2 C11.2 C12.2 C13.2 C14.2 C15.2 D2.2 D3.1 H1.2 H4.4 H6.4 H8.5 J1.1 J1.12 J1.13 J1.14 K1.1 K1.3 R2.2 R3.1 R4.2 R5.2 R12.2 R13.2 R14.2 R15.2 R17.2 R20.2 R22.2 R24.2 R26.2 R28.2 R30.2 R32.2 R34.2 R36.2 R38.2 R40.2 R42.2 U1.3 U1.5 U2.1 U3.1 U4.1 U4.15 U4.38 U4.39 U5.9 U5.15 U6.9 U6.15 U7.9 U7.15 U8.9 U8.15
  other v1: -3205,-3375 -1605,-3375 -1505,-3375 -1405,-3375 -1305,-3375 -205,-3375 -3155,-3275 -1555,-3275 -1255,-3275 -2905,-3175 -2805,-3175 -1605,-3175 -305,-3175 -3255,-3075 -3055,-3075 -1155,-3075 -355,-3075 -155,-3075 -3305,-2975 -2605,-2975 -2305,-2975 -2205,-2975 -2105,-2975 -2005,-2975 -1705,-2975 -1505,-2975 -1405,-2975 -1305,-2975 -1205,-2975 -705,-2975 -405,-2975 -105,-2975 -3255,-2875 -3055,-2875 -2955,-2875 -2855,-2875 -2655,-2875 -2355,-2875 -2255,-2875 -1655,-2875 -1255,-2875 -655,-2875 -155,-2875 -55,-2875 -3305,-2775 -3205,-2775 -3005,-2775 -2905,-2775 -2805,-2775 -2705,-2775 -2605,-2775 -2305,-2775 -1905,-2775 -1605,-2775 -1505,-2775 -1405,-2775 -1205,-2775 -1005,-2775 -805,-2775 -705,-2775 -605,-2775 -505,-2775 -405,-2775 -3255,-2675 -3155,-2675 -2655,-2675 -2555,-2675 -2255,-2675 -2055,-2675 -1955,-2675 -1855,-2675 -1255,-2675 -655,-2675 -155,-2675 -3305,-2575 -3205,-2575 -3105,-2575 -3005,-2575 -2905,-2575 -2705,-2575 -2205,-2575 -2105,-2575 -2005,-2575 -1905,-2575 -1405,-2575 -1305,-2575 -1205,-2575 -1005,-2575 -805,-2575 -605,-2575 -505,-2575 -405,-2575 -305,-2575 -105,-2575 -2855,-2475 -2555,-2475 -2255,-2475 -2155,-2475 -2055,-2475 -1855,-2475 -1655,-2475 -1055,-2475 -955,-2475 -855,-2475 -655,-2475 -555,-2475 -455,-2475 -355,-2475 -255,-2475 -55,-2475 -2905,-2375 -2705,-2375 -2605,-2375 -1805,-2375 -1705,-2375 -1605,-2375 -1205,-2375 -905,-2375 -805,-2375 -605,-2375 -405,-2375 -305,-2375 -205,-2375 -3355,-2275 -3255,-2275 -3155,-2275 -3055,-2275 -2955,-2275 -2855,-2275 -2655,-2275 -2555,-2275 -1955,-2275 -1855,-2275 -1655,-2275 -1555,-2275 -1155,-2275 -1055,-2275 -955,-2275 -855,-2275 -655,-2275 -555,-2275 -455,-2275 -355,-2275 -3405,-2175 -3305,-2175 -2705,-2175 -2605,-2175 -2305,-2175 -2205,-2175 -2005,-2175 -1905,-2175 -1705,-2175 -1605,-2175 -1505,-2175 -1205,-2175 -1105,-2175 -1005,-2175 -905,-2175 -805,-2175 -605,-2175 -505,-2175 -405,-2175 -305,-2175 -105,-2175 -3355,-2075 -3155,-2075 -3055,-2075 -2955,-2075 -1855,-2075 -1755,-2075 -1655,-2075 -1555,-2075 -1155,-2075 -1055,-2075 -855,-2075 -655,-2075 -555,-2075 -455,-2075 -355,-2075 -255,-2075 -155,-2075 -3405,-1975 -3105,-1975 -3005,-1975 -2305,-1975 -2205,-1975 -2105,-1975 -1905,-1975 -1805,-1975 -1705,-1975 -1605,-1975 -1505,-1975 -1005,-1975 -405,-1975 -205,-1975 -3255,-1875 -3155,-1875 -3055,-1875 -2555,-1875 -2155,-1875 -2055,-1875 -1955,-1875 -1855,-1875 -1755,-1875 -1655,-1875 -1555,-1875 -1155,-1875 -855,-1875 -655,-1875 -355,-1875 -155,-1875 -3405,-1775 -3205,-1775 -3005,-1775 -2305,-1775 -2205,-1775 -2105,-1775 -1905,-1775 -1805,-1775 -1705,-1775 -1605,-1775 -1505,-1775 -1205,-1775 -805,-1775 -505,-1775 -405,-1775 -205,-1775 -3355,-1675 -3255,-1675 -2655,-1675 -2555,-1675 -2455,-1675 -2155,-1675 -2055,-1675 -1955,-1675 -1855,-1675 -1755,-1675 -1655,-1675 -1155,-1675 -1055,-1675 -155,-1675 -3405,-1575 -3205,-1575 -3005,-1575 -2705,-1575 -2605,-1575 -2205,-1575 -2105,-1575 -1905,-1575 -1805,-1575 -1705,-1575 -1605,-1575 -1105,-1575 -1005,-1575 -905,-1575 -805,-1575 -705,-1575 -605,-1575 -2655,-1475 -2555,-1475 -2455,-1475 -2155,-1475 -2055,-1475 -1955,-1475 -1855,-1475 -1755,-1475 -1655,-1475 -1255,-1475 -1055,-1475 -555,-1475 -455,-1475 -355,-1475 -255,-1475 -155,-1475 -3405,-1375 -3205,-1375 -3005,-1375 -2905,-1375 -1805,-1375 -1705,-1375 -1605,-1375 -1405,-1375 -1205,-1375 -1105,-1375 -1005,-1375 -805,-1375 -705,-1375 -3155,-1275 -3055,-1275 -2955,-1275 -2855,-1275 -2655,-1275 -2555,-1275 -2455,-1275 -2355,-1275 -2255,-1275 -2155,-1275 -1955,-1275 -1855,-1275 -1755,-1275 -1655,-1275 -1355,-1275 -1055,-1275 -855,-1275 -155,-1275 -3405,-1175 -3205,-1175 -3005,-1175 -2605,-1175 -2405,-1175 -2305,-1175 -2105,-1175 -1905,-1175 -1805,-1175 -1605,-1175 -1205,-1175 -1105,-1175 -805,-1175 -3355,-1075 -3255,-1075 -3155,-1075 -3055,-1075 -2955,-1075 -2655,-1075 -2555,-1075 -2455,-1075 -2355,-1075 -2155,-1075 -2055,-1075 -1955,-1075 -1855,-1075 -1655,-1075 -1455,-1075 -355,-1075 -255,-1075 -155,-1075 -3405,-975 -3305,-975 -3205,-975 -3105,-975 -3005,-975 -2605,-975 -2505,-975 -2405,-975 -2105,-975 -1705,-975 -1605,-975 -1405,-975 -1305,-975 -1105,-975 -1005,-975 -905,-975 -805,-975 -705,-975 -605,-975 -505,-975 -205,-975 -3355,-875 -3255,-875 -3155,-875 -3055,-875 -2755,-875 -2555,-875 -2355,-875 -1655,-875 -1555,-875 -1355,-875 -1255,-875 -1055,-875 -955,-875 -555,-875 -455,-875 -355,-875 -255,-875 -155,-875 -3405,-775 -3305,-775 -3205,-775 -3105,-775 -3005,-775 -2905,-775 -2705,-775 -2605,-775 -2505,-775 -2405,-775 -2105,-775 -1705,-775 -1605,-775 -1305,-775 -1205,-775 -1005,-775 -905,-775 -805,-775 -705,-775 -605,-775 -505,-775 -405,-775 -305,-775 -205,-775 -3255,-675 -2955,-675 -2355,-675 -1855,-675 -1655,-675 -1355,-675 -1155,-675 -1055,-675 -355,-675 -255,-675 -155,-675 -3405,-575 -3305,-575 -3205,-575 -3005,-575 -2905,-575 -2505,-575 -2405,-575 -1905,-575 -1705,-575 -1605,-575 -1505,-575 -1305,-575 -505,-575 -305,-575 -205,-575 -3255,-475 -2355,-475 -1555,-475 -1355,-475 -1155,-475 -1055,-475 -155,-475 -3405,-375 -3205,-375 -3005,-375 -2705,-375 -2605,-375 -2505,-375 -2405,-375 -1705,-375 -1605,-375 -1405,-375 -1305,-375 -1205,-375 -1105,-375 -1005,-375 -705,-375 -605,-375 -505,-375 -405,-375 -305,-375 -3355,-275 -3255,-275 -3155,-275 -2855,-275 -2655,-275 -2355,-275 -2255,-275 -1555,-275 -1455,-275 -1355,-275 -1255,-275 -1155,-275 -1055,-275 -955,-275 -855,-275 -3205,-175 -3105,-175 -2805,-175 -2705,-175 -2505,-175 -2305,-175 -1805,-175 -805,-175 -705,-175 -605,-175 -505,-175 -305,-175 -3155,-75 -2955,-75 -2855,-75 -2755,-75 -2655,-75 -2355,-75 -2255,-75 -2155,-75 -2055,-75 -1955,-75 -1855,-75 -1755,-75 -855,-75 -355,-75 -255,-75
IO0: Q2.3 R14.1 U4.25 | length 1998.7
  Top Layer w10: U4.25 -2488.65,-2298.65 -2430,-2240 -2334,-2240 -2299,-2205 -2221.12,-2127.12 R14.1 -2168,-2123.78 v1(-2168,-2077) ; v1(-1160,-2878) -1159.12,-2877.12 Q2.3
  Bottom Layer w10: v1(-2168,-2077) -1961,-2077 v1(-1160,-2878)
IO2: R16.1 U4.24 | length 322.3
  Top Layer w10: U4.24 -2359.32,-2334.33 -2222.12,-2197.12 R16.1
IO12: R15.1 U4.14 | length 195.6
  Top Layer w10: U4.14 -1777,-2462 R15.1
IO15: R17.1 U4.23 | length 228.7
  Top Layer w10: U4.23 -2304.68,-2400.51 -2304.68,-2354.68 -2217.8,-2267.8 R17.1
IO34: H8.2 U4.6 | length 1130.4
  Top Layer w10: v1(-1857,-2866) -1781,-2866 U4.6
  Bottom Layer w10: H8.2 -2855,-2928.19 -2771.81,-2845 -1878,-2845 v1(-1857,-2866)
IO35: K1.2 K1.4 R18.2 U4.7 | length 858.9
  Top Layer w10: U4.7 -1610,-2815 -1419.66,-2624.66 R18.2 -1150.39,-2624.66 -1147.05,-2628 ; K1.2 -1147.05,-2628 ; K1.4 -1147.05,-2628
IR: H6.2 U4.16 | length 1170.8
  Top Layer w10: U4.16 -1959,-2405.48 v1(-1959,-2477)
  Bottom Layer w10: H6.2 -2855,-2681.81 -2726.81,-2810 -2292,-2810 v1(-1959,-2477)
LED-STATUS: H6.3 U4.37 | length 1811.7
  Top Layer w10: H6.3 -2955,-2681.81 -3047.19,-2774 -3147,-2774 -3225,-2852 -3225,-3009 -3127,-3107 -3127,-3334 -3068.88,-3392.12 -2670.12,-3392.12 -2630,-3352 -2630,-3115 -2580,-3065 U4.37
NetC3_1: C3.1 D1.1 U1.1 | length 1134.2
  Top Layer w10: v1@-598.12,-1649.12 v1@-597.69,-1648.69
  Top Layer w35: D1.1 C3.1 ; v1(-598,-1649) -597.69,-1648.69 U1.1
  Bottom Layer w35: C3.1 -721.85,-1772.85 v1(-598,-1649)
  other v1: -609.34,-1659.34 -621.34,-1649.34 -609.34,-1637.34
NetD2_1: D2.1 L1.1 U1.2 | length 581.3
  Top Layer w35: D2.1@-728.08,-1644.54 -590.69,-1781.93 -590.69,-1836.2 -573.74,-1853.14 -481.77,-1853.14 -452,-1823.37 U1.2
NetD3_2: D3.2 R11.1 | length 74.3
  Top Layer w35: D3.2 -1078.39,-1782.12 R11.1
NetJ1_4: J1.4 R5.1 | length 245.6
  Top Layer w10: R5.1 -343.03,-3143.03 -320,-3120 -320,-3040 -294.21,-3014.21 J1.4
NetJ1_5: J1.5 J1.7 R7.1 | length 334
  Top Layer w10: R7.1 -403.02,-2940 v1(-350,-2940) ; J1.5 -219.53,-2994.53 -210,-2985 v1(-210,-2975) -210,-2965 -220,-2955 -258.35,-2955 J1.7
  Bottom Layer w10: v1(-350,-2940) -245,-2940 v1(-210,-2975)
NetJ1_6: J1.6 J1.8 R6.1 | length 257.1
  Top Layer w10: R6.1 -403.92,-3041.9 -317.03,-2955 -305,-2955 ; J1.6 -295.16,-2974.84 -305,-2965 -305,-2955 ; J1.8 -295.47,-2935.47 -305,-2945 -305,-2955
NetJ1_10: J1.10 R4.1 | length 167.4
  Top Layer w10: R4.1 -361.97,-2843.03 -308.9,-2896.1 J1.10
NetQ1_1: Q1.1 R8.2 | length 93.8
  Top Layer w10: Q1.1 -952.74,-3079.53 R8.2
NetQ2_1: Q2.1 R9.2 | length 121.5
  Top Layer w10: Q2.1 -1024.8,-2914.53 -961.15,-2850.88 -955.88,-2850.88 R9.2
NetR1_2: R1.2 R3.2 U1.4 | length 312.2
  Top Layer w10: R1.2 R3.2 U1.4
NetR19_1: R19.1 R20.1 U5.4 | length 318.2
  Top Layer w10: R19.1 R20.1 -2603.06,-1796.93 -2544.99,-1855 U5.4
NetR21_1: R21.1 R22.1 U5.3 | length 305.4
  Top Layer w10: R21.1 -2603.06,-1861.14 R22.1 -2603.06,-1925.93 -2573.99,-1955 U5.3
NetR23_1: R23.1 R24.1 U5.2 | length 293.6
  Top Layer w10: R23.1 -2602.92,-2053.66 R24.1 -2601.85,-2055 U5.2
NetR25_1: R25.1 R26.1 U6.4 | length 308
  Top Layer w10: R25.1 R26.1 -1982.82,-709.52 -1922.34,-770 U6.4
NetR27_1: R27.1 R28.1 U6.3 | length 298
  Top Layer w10: R28.1 -1982.82,-837.39 R27.1 -1983.82,-839.52 -1953.34,-870 U6.3
NetR29_1: R29.1 R30.1 U6.2 | length 284.2
  Top Layer w10: R29.1 -1983.82,-904.7 R30.1 -1983.21,-970 U6.2
NetR31_1: R31.1 R32.1 U7.4 | length 292.2
  Top Layer w10: U7.4 -650,-785.99 -591.09,-727.08 R32.1 R31.1
NetR33_1: R33.1 R34.1 U7.3 | length 281.4
  Top Layer w10: U7.3 -750,-756.99 -720.09,-727.08 R33.1 R34.1
NetR35_1: R35.1 R36.1 U7.2 | length 270.1
  Top Layer w10: U7.2 -850,-726.74 R36.1 R35.1
NetR37_1: R37.1 R38.1 U8.4 | length 305.5
  Top Layer w10: R37.1 R38.1 -2772.21,-438.72 -2715.92,-495 U8.4
NetR39_1: R39.1 R40.1 U8.3 | length 293.9
  Top Layer w10: R39.1 R40.1 -2772.21,-568.91 -2746.12,-595 U8.3
NetR41_1: R41.1 R42.1 U8.2 | length 281.8
  Top Layer w10: R41.1 R42.1 -2771.43,-695 U8.2
NetU5_5: U5.5 U5.6 | length 100
  Top Layer w35: U5.5 U5.6
NetU6_5: U6.5 U6.6 | length 100
  Top Layer w35: U6.5 U6.6
NetU7_5: U7.5 U7.6 | length 100
  Top Layer w35: U7.5 U7.6
NetU8_5: U8.5 U8.6 | length 100
  Top Layer w10: U8.5 U8.6
RST_CH340: Q1.2 R9.1 U2.14 | length 396.6
  Top Layer w10: Q1.2 -1024.8,-3004.72 -1016.03,-2995.94 -1016.03,-2969.21 -946.13,-2899.32 R9.1 ; v1(-865,-3080) -863.94,-3081.06 -804.15,-3081.06 U2.14
  Bottom Layer w10: v1(-995,-2950) v1(-865,-3080)
RXD: U2.3 U4.34 | length 2053
  Top Layer w10: U4.34 -2410,-2915 -2235,-3090 v1(-2068,-3090) ; v1(-677,-3082) -676.94,-3082.06 -576.97,-3082.06 U2.3
  Bottom Layer w10: v1(-2068,-3090) -1567,-3090 -1488,-3169 -764,-3169 v1(-677,-3082)
SCL: H4.2 U4.36 | length 816.9
  Top Layer w10: H4.2 -2955,-3273.94 -2867.94,-3361 -2689,-3361 -2661,-3333 -2661,-3061 -2615,-3015 U4.36
SDA: H4.3 U4.33 | length 789.1
  Top Layer w10: H4.3 -2855,-3273.94 -2798.94,-3330 -2709,-3330 -2690,-3311 -2690,-2978 -2577,-2865 U4.33
STEP-1: U4.30 U5.7 | length 1378.3
  Top Layer w10: U4.30 v1(-2404,-2715)
  Bottom Layer w10: v1(-2404,-2715) -2346,-2657 -2346,-2341 -2272,-2267 -2272,-1596 -2313,-1555 U5.7
STEP-2: U4.9 U7.7 | length 2998.5
  Top Layer w10: U4.9 -1650,-2715 -1319,-2384 -1319,-1722 -1431,-1610 -1431,-1239 -1212,-1020 -440,-1020 U7.7
STEP-3: U4.28 U8.7 | length 2615
  Top Layer w10: U4.28 -2487.65,-2616 v1(-2404,-2616)
  Bottom Layer w10: U8.7 -2434,-316 -2434,-997 -2490,-1053 -2490,-2227 -2404,-2313 v1(-2404,-2616)
STEP-4: U4.12 U6.7 | length 2470.4
  Top Layer w10: U4.12 -1639,-2565 -1419,-2345 -1419,-1768 -1528,-1659 -1528,-707 U6.7
TXD: U2.2 U4.35 | length 2041.4
  Top Layer w10: U4.35 -2417,-2965 -2257,-3125 v1(-2128,-3125) ; v1(-642,-3132) -641.94,-3132.06 -576.97,-3132.06 U2.2
  Bottom Layer w10: v1(-2128,-3125) -1587,-3125 -1507,-3205 -715,-3205 v1(-642,-3132)
VIN: C2.2 C12.1 C13.1 C14.1 C15.1 D1.2 H1.1 U5.16 U6.16 U7.16 U8.16 | length 8683.1
  Top Layer w35: C12.1 -3211.44,-2158.56 -2878.56,-2158.56 U5.16 ; U8.16 -2905,-945 C15.1 -2655,-1380 C14.1 -2115,-1220 U6.16 ; C13.1 U7.16 ; D1.2 C2.2 -181.95,-2564.07 -181.95,-2461.57 H1.1
  Bottom Layer w35: C12.1 -3336,-2041.12 -3336,-1810 -3105,-1579 -3105,-1217 -3018,-1130 C15.1 ; C14.1 -1964,-1229 -1728,-1229 -1437,-938 -1437,-622 C13.1 ; U7.16 -812,-292 -170,-292 -62,-400 -62,-2341.62 H1.1
VN: H8.3 U4.5 | length 1261.9
  Top Layer w10: v1(-1856,-2916) -1781,-2916 U4.5
  Bottom Layer w10: H8.3 -2955,-2951.81 -2882.81,-3024 -1964,-3024 v1(-1856,-2916)
VP: H8.4 U4.4 | length 1367.7
  Top Layer w10: v1(-1856,-2965) U4.4
  Bottom Layer w10: H8.4 -3055,-2951.81 -2950.81,-3056 -1947,-3056 v1(-1856,-2965)
pads on no net: J1. J1.2 J1.3 J1.9 J1.11 U1.6 U2.7 U2.8 U2.9 U2.10 U2.11 U2.12 U2.15 U4.17 U4.18 U4.19 U4.20 U4.21 U4.22 U4.32

## Polygon pours and split planes (outlines as drawn)
GND on Top Layer "NONET_L-01_P-001" (solid, pour order 0): -3455,-3291.6 ccw(c-3339.47,-3291.6) -3339.47,-3407.12 -2605,-3407.12 -2605,-3157.12 -1665,-3157.12 -1665,-3407.12 -122.4,-3407.12 ccw(c-122.4,-3284.73) 0,-3284.73 0,-117.43 ccw(c-117.43,-117.43) -117.43,0 -3340.28,0 ccw(c-3340.28,-114.72) -3455,-114.72
GND on Bottom Layer "NONET_L-01_P-001" (solid, pour order 1): -3455,-3291.6 ccw(c-3339.47,-3291.6) -3339.47,-3407.12 -2605,-3407.12 -2605,-3157.12 -1665,-3157.12 -1665,-3407.12 -122.4,-3407.12 ccw(c-122.4,-3284.73) 0,-3284.73 0,-117.43 ccw(c-117.43,-117.43) -117.43,0 -3340.28,0 ccw(c-3340.28,-114.72) -3455,-114.72

## Keep-outs
Keep-Out Layer:
  the board outline again, w10

## Other copper
Top Layer:
  region net NetC3_1: -610.12,-1622.13 cw(c-610.12,-1649.11) -583.14,-1648.8 cw(c-610.11,-1647.82) -637.06,-1649.18 cw(c-610.13,-1649.06)
  region net GND: -3190,-3131.71 -3190,-3163 -3443,-3163 -3443,-2381 -2932,-2381 -2932,-2533 -2934,-2535 -3355,-2535 -3355,-3128.96
  region net GND: -1728.86,-11 -889,-11 -889,-254 -1560,-254 -1618,-196 -1729,-196
  region net GND: -311,-227 -13,-227 -13,-2054 -122.4,-2054 -122.4,-410.6 -204,-329 -311,-329
  region net GND: -1205,-3396.06 -1205,-3290 -717,-3290 -664,-3237 -272,-3237 -272,-3395.06
Bottom Layer:
  region net NetC3_1: -610.12,-1622.13 cw(c-610.12,-1649.11) -583.14,-1648.8 cw(c-610.11,-1647.82) -637.06,-1649.18 cw(c-610.13,-1649.06)

## Silkscreen, mask and mechanical layers (free items; w line width, h text height)
Top Overlay:
  text "CUT WIRE" at -1985,-1898.58 h118.11
  text "VERSION 1.0" at -1985,-2018.69 h118.11
Bottom Overlay:
  text "GND" at -303,-2290 h100
  text "VCC" at -303,-2488.16 h100